# Altium PCB 175-00023, rev2, PCB, Sinistro Pwr Supply.PcbDoc (part 2 of 2)
Units mm, origin at the board's own origin, x right, y up, seen from the top; angles counter-clockwise.
Board outline 210 x 100 mm, 5 copper layers (TopLayer (*.GTL), MidLayer1 (*.G1), AGND (*.GP1), GND (*.GP2), BottomLayer (*GBL)); 99 components, 65 nets, 412 pads, 73 vias.
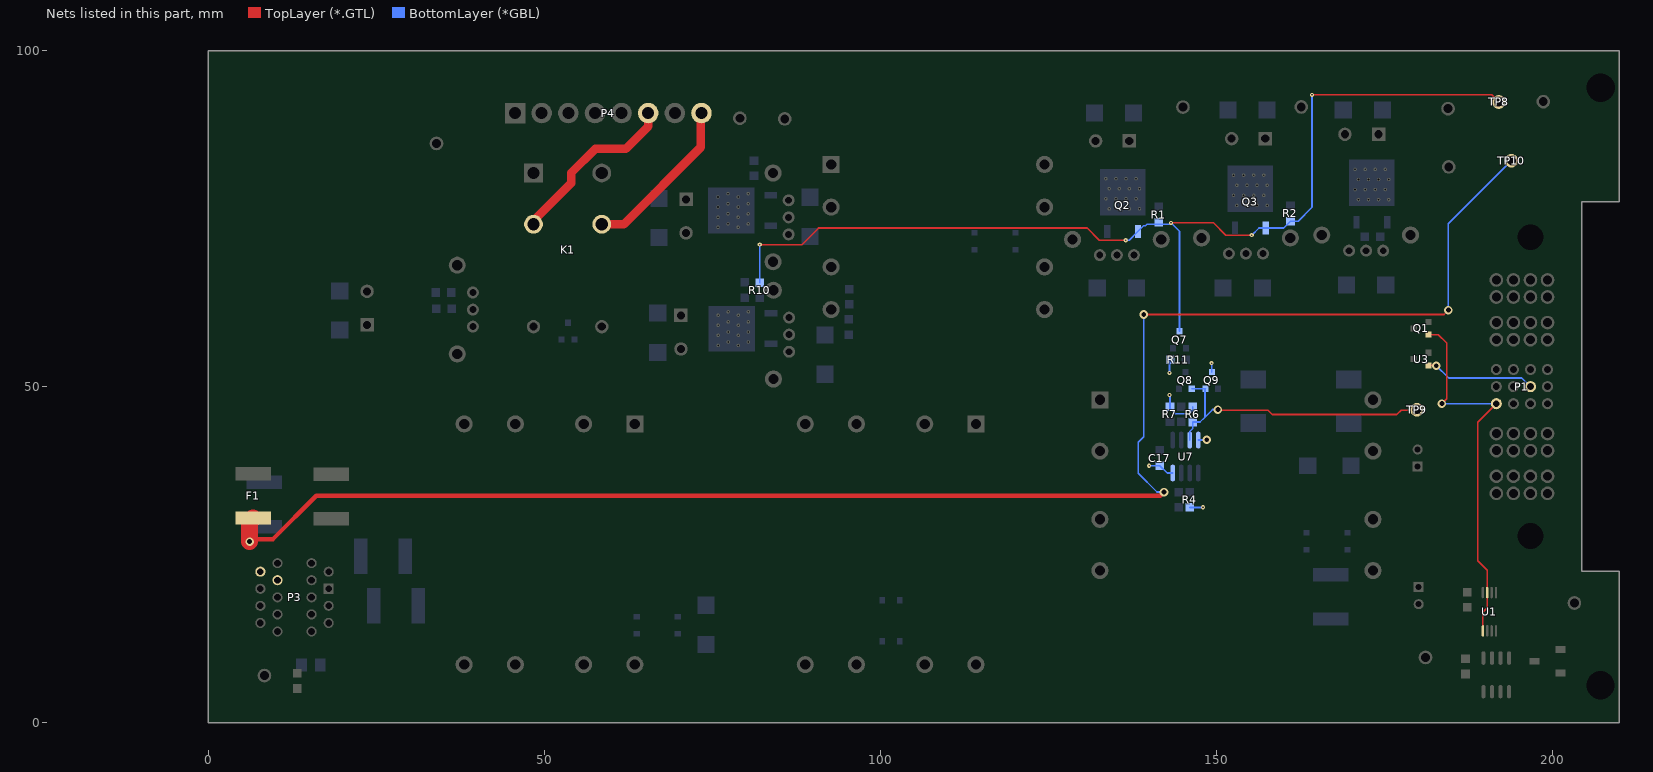
[diagram p5: the nets of this part, all layers, seen from the top]

## Via types
v1: diameter 0.61, hole 0.254, TopLayer (*.GTL) to BottomLayer (*GBL), 37 vias
v2: diameter 1.27, hole 0.711, TopLayer (*.GTL) to BottomLayer (*GBL), 36 vias

## Nets (pads, with @x,y where several pads share a name; then routed paths per layer and width w, separated by ;. In a path a pad name is that pad's centre, name@x,y a point inside that pad or via, vN(x,y) a via of type N, cw(c..) or ccw(c..) an arc to the next point about the centre after c; other vN are vias at no path point) (continued)
POSV_ON: Q2.1 Q3.1 Q7.3 R1.1 R2.1 R10.1 TP8.1 | length 154.8
  TopLayer (*.GTL) w0.254: v1(82.093,71.12) 88.367,71.12 90.843,73.597 130.797,73.597 132.613,71.78 v1(136.55,71.78) ; v1(143.281,74.371) 149.606,74.371 151.435,72.542 v1(155.296,72.542) ; v1(164.262,93.421) 190.983,93.421 TP8.1@192.049,92.354
  BottomLayer (*GBL) w0.254: R10.1@82.093,65.482 v1(82.093,71.12) ; v1(136.55,71.78) 137.046,71.78 Q2.1@138.367,73.101 139.19,73.924 139.477,73.924 139.71,74.157 143.067,74.157 v1(143.281,74.371) 144.549,73.104 Q7.3@144.549,58.235 ; v1(155.296,72.542) 156.365,73.612 Q3.1@157.363,73.612 160.048,73.612 R2.1@161.061,74.625 162.204,74.625 164.262,76.683 v1(164.262,93.421)
SILICON_SN: P1.6 U3.1 | length 16.5
  TopLayer (*.GTL) w0.254: U3.1@181.592,53.162 182.71,53.162 v2(182.761,53.111)
  BottomLayer (*GBL) w0.254: v2(182.761,53.111) 184.589,51.283 195.487,51.283 P1.6@196.77,50
SPLY_DLY: Q8.1 Q9.2 R6.2 TP9.1 U7.3 | length 43.9
  TopLayer (*.GTL) w0.254: v2(150.266,46.584) 150.343,46.507 157.71,46.507 158.371,45.847 176.86,45.847 177.521,46.507 179.814,46.507 TP9.1@179.865,46.558
  BottomLayer (*GBL) w0.254: U7.3@146.075,42.049 146.075,43.332 146.507,43.764 R6.2@146.507,44.729 147.599,44.729 148.336,45.466 ; Q8.1@146.365,49.677 Q9.2@148.402,49.677 148.336,49.611 148.336,45.466 ; v2(150.266,46.584) 149.454,46.584 148.336,45.466
SW_LINE: K1.4 P4.8 | length 24.6
  TopLayer (*.GTL) w1.27: K1.4@58.58,74.168 61.864,74.168 73.312,85.616 73.312,90.603 P4.8@73.414,90.705
SW_NEUT: K1.3 P4.6 | length 26.3
  TopLayer (*.GTL) w1.27: K1.3@48.42,74.168 48.42,74.676 54.008,80.264 54.008,81.788 57.602,85.382 62.147,85.382 65.489,88.724 P4.6@65.489,90.705
VCC: C17.2 F1.2 P3.5 P3.15 Q9.3 R4.1 R6.1 R7.2 R11.2 TP10.1 U7.4 U7.8 | length 260.5
  TopLayer (*.GTL) w0.254: v2(139.217,60.731) 183.896,60.731 v2(184.556,61.392)
  TopLayer (*.GTL) w0.635: v2(6.172,26.949) 6.528,27.305 9.65,27.305 16.102,33.757 141.681,33.757 v2(142.24,34.315)
  TopLayer (*.GTL) w2.54: v2(6.172,26.949) 6.147,26.949 6.147,29.898 F1.2@6.706,30.457
  BottomLayer (*GBL) w0.254: v2(139.217,60.731) 139.217,42.545 138.405,41.732 138.405,37.109 141.199,34.315 v2(142.24,34.315) ; v1(140.03,38.227) C17.2@141.63,38.227 142.709,37.149 U7.8@143.535,37.149 ; v1(143.053,48.743) 143.129,48.666 R7.2@143.129,47.041 143.129,46.761 143.916,45.974 145.974,45.974 146.507,46.507 R6.1@146.507,47.015 ; v1(143.053,52.045) 143.053,53.83 R11.2@143.197,53.975 ; R4.1@146.101,32.029 148.031,32.029 v1(148.057,32.055) ; U7.4@147.345,42.049 148.551,42.049 v2(148.59,42.088) ; v1(149.327,53.492) 149.352,53.467 Q9.3@149.352,52.177 ; v2(184.556,61.392) 184.556,74.244 TP10.1@193.929,83.617
~CS_SLOT: P1.4 Q1.1 U1.1 U1.7 | length 56.3
  TopLayer (*.GTL) w0.254: Q1.1@181.592,57.734 183.065,57.734 184.302,56.497 184.302,48.176 v2@183.65,47.523 ; U1.1@189.685,13.66 189.685,16.449 190.335,17.099 U1.7@190.335,19.36 190.335,22.677 188.933,24.079 188.933,44.703 P1.4@191.69,47.46
  BottomLayer (*GBL) w0.254: v2(183.599,47.473) P1.4@191.677,47.473
pads on no net: D3.2 P1.0 P1.1 P1.7 P1.8 P1.9 P1.10 U4.0 U5.0 U6.0 U7.5 U8.0 U9.0 U10.0
copper on no net: | length 10.5
  TopLayer (*.GTL) w0.178: v1(153.017,94.818) v1@153.12,94.715
  BottomLayer (*GBL) w0.254: 164.897,9.271 ccw(c163.253,9.271) 164.897,9.271

## Polygon pours and split planes (outlines as drawn)
VCC on AGND (*.GP1) (split plane): 151.827,30.545 138.621,30.545 138.495,62.8 151.827,62.8
NetF3_1 on AGND (*.GP1) (split plane): 81.963,72.125 81.964,72.123 81.963,72.12 81.969,72.098 81.973,72.076 81.975,72.073 81.975,72.071 81.989,72.052 82.001,72.034 82.004,72.032 82.005,72.03 83.056,71.063 83.056,70.36 22.655,70.36 22.605,70.351 22.563,70.323 22.535,70.281 22.526,70.231 22.526,32.184 14.099,32.184 14.099,76.071 74.929,76.071 74.955,76.076 74.979,76.08 75.001,76.095 75.021,76.108 75.034,76.128 75.049,76.15 75.053,76.174 75.059,76.2 75.06,79.832 75.06,79.833 81.963,79.88
NetF4_1 on AGND (*.GP1) (split plane): 85.469,10.33 85.437,10.288 85.411,10.226 85.403,10.16 85.403,5.336 26.841,5.336 26.775,5.327 26.713,5.302 26.66,5.261 26.619,5.208 26.594,5.146 26.585,5.08 26.585,2.796 15.247,2.796 15.489,11.809 78.229,11.809 78.26,11.813 78.295,11.818 78.325,11.83 78.357,11.843 78.385,11.865 78.41,11.884 78.43,11.911 78.45,11.937 78.463,11.968 78.476,11.999 78.48,12.031 78.485,12.065 78.482,18.652 78.482,18.653 78.482,18.655 78.125,50.803 78.12,50.835 78.116,50.866 78.115,50.868 78.115,50.869 78.103,50.899 78.09,50.928 78.089,50.929 78.089,50.931 78.069,50.956 78.05,50.981 78.048,50.982 78.048,50.983 78.022,51.002 77.996,51.022 77.995,51.022 77.994,51.023 77.964,51.035 77.935,51.047 77.933,51.048 77.932,51.048 77.9,51.052 77.868,51.056 73.152,51.056 73.102,63.244 85.469,63.244
NetF2_1 on AGND (*.GP1) (split plane): 143.381,74.287 130.939,74.287 130.939,80.645 130.93,80.695 130.902,80.737 130.86,80.765 130.81,80.774 10.795,80.774 10.745,80.765 10.703,80.737 10.675,80.695 10.666,80.645 10.666,32.184 3.304,32.184 3.304,84.326 143.381,84.326
A on AGND (*.GP1) (split plane): 209.49,78.01 204.4,78.01 204.3,78.001 204.205,77.972 204.116,77.924 204.039,77.861 203.976,77.784 203.928,77.695 203.899,77.6 203.89,77.5 203.89,22.5 203.899,22.4 203.928,22.305 203.976,22.216 204.039,22.139 204.116,22.076 204.205,22.028 204.3,21.999 204.4,21.99 209.49,21.99 209.49,0.51 0.51,0.51 0.51,99.49 209.49,99.49
NetFER3_1 on GND (*.GP2) (split plane): 162.304,45.466 162.304,45.464 162.304,45.463 162.308,45.431 162.313,45.4 162.313,45.398 162.313,45.397 162.326,45.367 162.338,45.338 162.339,45.337 162.34,45.335 162.359,45.31 162.379,45.285 162.38,45.284 162.381,45.283 162.407,45.264 162.432,45.244 162.433,45.244 162.435,45.243 162.464,45.231 162.494,45.219 162.495,45.218 162.497,45.218 162.528,45.214 162.56,45.21 162.562,45.21 162.563,45.21 183.6,45.464 203.89,45.464 203.89,32.278 188.851,32.011 188.851,40.005 188.842,40.071 188.817,40.133 188.776,40.186 188.723,40.227 188.661,40.252 188.595,40.261 148.846,40.261 148.846,47.775 162.304,47.775
NetFER3_2 on GND (*.GP2) (split plane): 203.89,67.567 203.89,45.976 183.599,45.976 183.597,45.976 183.596,45.976 162.816,45.725 162.816,48.031 162.807,48.098 162.782,48.159 162.741,48.213 162.688,48.253 162.626,48.279 162.56,48.288 148.844,48.288 148.782,54.608 189.23,54.608 189.296,54.617 189.358,54.642 189.411,54.683 189.452,54.736 189.477,54.798 189.486,54.864 189.486,67.811
NetF6_1 on GND (*.GP2) (split plane): 181.354,60.53 136.587,60.53 136.521,60.522 136.459,60.496 136.406,60.455 136.365,60.402 136.34,60.341 136.331,60.274 136.331,12.956 28.36,12.975 28.482,21.307 35.402,21.271 36.602,18.909 36.605,18.903 36.608,18.896 36.624,18.875 36.639,18.853 36.645,18.849 36.649,18.843 36.67,18.827 36.69,18.81 36.696,18.807 36.702,18.803 36.726,18.793 36.75,18.781 36.757,18.78 36.764,18.777 36.79,18.774 36.816,18.769 36.823,18.769 36.83,18.768 130.175,18.794 130.208,18.798 130.241,18.802 130.241,18.803 130.272,18.815 130.303,18.828 130.33,18.848 130.356,18.868 130.356,18.869 130.376,18.895 130.397,18.921 130.397,18.922 130.409,18.952 130.422,18.983 130.422,18.984 130.427,19.016 130.431,19.049 130.527,66.765 165.099,66.671 165.101,66.672 165.102,66.671 165.134,66.676 165.165,66.68 165.167,66.681 165.169,66.681 165.198,66.693 165.227,66.705 165.228,66.707 165.23,66.707 165.255,66.727 165.28,66.746 165.281,66.748 165.283,66.749 165.302,66.774 165.321,66.799 165.322,66.801 165.323,66.802 165.334,66.832 165.347,66.861 165.347,66.863 165.348,66.864 165.351,66.896 165.355,66.927 165.355,66.929 165.355,66.931 165.136,84.666 165.169,84.685 181.354,84.685
NetF5_1 on GND (*.GP2) (split plane): 164.643,84.909 164.631,84.879 164.63,84.878 164.63,84.876 164.626,84.845 164.622,84.813 164.622,84.812 164.622,84.81 164.84,67.185 130.272,67.278 130.271,67.278 130.238,67.274 130.205,67.27 130.175,67.257 130.143,67.244 130.117,67.224 130.09,67.204 130.069,67.177 130.049,67.151 130.036,67.119 130.024,67.089 130.019,67.056 130.015,67.023 129.919,19.306 36.987,19.281 35.788,21.642 35.785,21.648 35.783,21.653 35.766,21.675 35.751,21.698 35.746,21.702 35.742,21.707 35.721,21.723 35.7,21.741 35.694,21.744 35.689,21.748 35.664,21.758 35.64,21.77 35.633,21.771 35.628,21.774 35.601,21.777 35.574,21.782 35.568,21.782 35.561,21.783 28.486,21.82 28.487,27.994 122.555,27.994 122.621,28.002 122.683,28.028 122.736,28.069 122.777,28.122 122.802,28.183 122.811,28.25 122.811,71.524 150.495,71.524 150.561,71.533 150.623,71.559 150.676,71.599 150.717,71.652 150.742,71.714 150.751,71.78 150.751,84.907 164.652,84.932
NetC23_pos on GND (*.GP2) (split plane): 43.91,57.215 9.05,57.215 9.025,57.21 9.004,57.196 8.99,57.175 8.985,57.15 8.985,33.505 4.431,33.48 4.663,62.622 43.91,62.622
VCC on GND (*.GP2) (split plane): 8.985,27.815 8.983,27.813 8.969,27.792 8.964,27.768 8.91,23.173 8.91,23.172 8.912,23.16 8.915,23.148 8.915,23.147 8.922,23.137 8.928,23.127 8.929,23.127 8.929,23.126 9.639,22.416 9.66,22.402 9.685,22.397 11.779,22.397 11.779,19.987 9.712,19.987 8.461,21.238 8.44,21.252 8.415,21.257 4.289,21.257 4.289,23.73 4.313,23.734 4.334,23.748 4.348,23.769 4.353,23.794 4.429,33.221 8.985,33.246
GND on GND (*.GP2) (split plane): 209.49,78.01 204.4,78.01 204.3,78.001 204.205,77.972 204.116,77.924 204.039,77.861 203.976,77.784 203.928,77.695 203.899,77.6 203.89,77.5 203.89,68.08 189.234,68.328 189.232,68.328 189.23,68.328 189.199,68.324 189.168,68.321 189.166,68.32 189.164,68.319 189.135,68.308 189.106,68.296 189.104,68.295 189.102,68.294 189.077,68.275 189.052,68.256 189.051,68.254 189.049,68.253 189.03,68.228 189.01,68.204 189.009,68.202 189.008,68.2 188.996,68.171 188.984,68.142 188.983,68.14 188.983,68.138 188.978,68.107 188.974,68.076 188.974,68.074 188.974,68.072 188.974,55.12 148.524,55.12 148.522,55.12 148.521,55.12 148.489,55.116 148.457,55.111 148.456,55.111 148.455,55.111 148.425,55.098 148.396,55.086 148.395,55.085 148.393,55.085 148.368,55.065 148.343,55.045 148.342,55.044 148.341,55.043 148.321,55.018 148.302,54.992 148.301,54.991 148.301,54.99 148.289,54.96 148.276,54.93 148.276,54.929 148.276,54.928 148.272,54.896 148.268,54.864 148.268,54.863 148.268,54.862 148.334,48.03 148.334,40.005 148.343,39.939 148.368,39.877 148.409,39.824 148.462,39.783 148.524,39.758 148.59,39.749 188.339,39.749 188.339,31.75 188.339,31.748 188.339,31.745 188.343,31.715 188.348,31.684 188.348,31.682 188.349,31.679 188.361,31.651 188.373,31.622 188.375,31.62 188.375,31.618 188.395,31.594 188.414,31.569 188.416,31.567 188.417,31.566 188.442,31.547 188.467,31.528 188.469,31.527 188.471,31.526 188.5,31.514 188.529,31.503 188.531,31.502 188.533,31.501 188.564,31.498 188.595,31.494 188.597,31.494 188.6,31.494 203.89,31.766 203.89,22.5 203.899,22.4 203.928,22.305 203.976,22.216 204.039,22.139 204.116,22.076 204.205,22.028 204.3,21.999 204.4,21.99 209.49,21.99 209.49,0.51 0.51,0.51 0.51,99.49 209.49,99.49

## Keep-outs
KeepOutLayer:
  lines w0.203: -3.625,3.023 -3.625,8.103 -8.07,8.103 -8.07,91.923 -3.625,91.923 -3.625,97.003 ; -3.625,95.003 204.655,95.003 ; -3.599,2.737 184.844,2.737 ; 204.655,3.023 204.655,8.103 208.465,8.103 208.465,91.923 204.655,91.923 204.655,97.003

## Other copper
TopLayer (*.GTL):
  text "*.GTL - TOP LAYER GERBER DATA" at 58.975,-30.745 h2.03
MidLayer1 (*.G1):
  text "*.G1 --  MID LAYER GERBER DATA" at 60.681,-30.988 h2.03
BottomLayer (*GBL):
  text "c" at 163.779,8.941 h1.52
  text "2012, Las Cumbres Observatory" at 160.528,8.407 h1.52
  text "175-00023, Rev2, SINISTRO PWR SUPPLY" at 163.5,5.105 h1.52
  text "*.GBL - BOTTOM LAYER GERBER DATA" at 58.975,-30.745 h2.03
AGND (*.GP1) (plane layer: these items are gaps in the copper):
  lines w0.127: 138.43,62.865 138.557,30.48 151.892,30.48 151.892,62.865 138.43,62.865
  lines w0.254: 74.93,79.962 82.093,80.01 82.093,72.125 83.185,71.12 83.185,70.231 68.58,70.231 22.655,70.231 22.655,32.055 13.97,32.055 13.97,76.2 17.78,76.2 69.85,76.2 74.929,76.2 74.931,79.833 ; 3.175,32.055 3.175,84.455 143.51,84.455 143.51,74.157 130.81,74.157 130.81,80.645 10.795,80.645 10.795,32.055 3.175,32.055
  lines w0.508: 19.856,12.065 15.24,12.065 ; 72.844,63.681 72.897,50.8 77.868,50.8 78.226,18.652 78.229,12.065 15.24,12.065 ; 73.025,63.5 85.725,63.5 85.725,10.16 ; 85.659,10.16 85.659,5.08 26.841,5.08 26.841,2.54 14.984,2.54 15.24,12.065
  text "*.GP1 - INTERNAL PLANE LAYER 1 GERBER DATA" at 58.975,-30.745 h2.03
GND (*.GP2) (plane layer: these items are gaps in the copper):
  lines w0.127: 4.224,23.859 4.224,21.192 8.415,21.192 9.685,19.922 11.844,19.922 11.844,22.462 9.685,22.462 8.975,23.172 9.028,27.767 ; 4.289,23.794 4.599,62.687 43.975,62.687 43.975,57.15 9.05,57.15 9.05,27.775 ; 202.176,32.69 202.192,32.674
  lines w0.254: 4.365,33.35 9.05,33.376
  lines w0.508: 28.1,12.7 28.229,21.565 ; 28.211,12.719 136.587,12.7 136.587,60.274 181.61,60.274 181.61,84.941 165.1,84.941 164.878,84.813 165.099,66.928 130.271,67.022 130.175,19.05 36.83,19.025 35.56,21.527 28.229,21.565 ; 165.034,85.189 150.495,85.163 150.495,71.78 122.555,71.78 122.555,28.25 120.65,28.25 28.231,28.25 28.229,21.565 ; 204.116,45.72 183.599,45.72 162.56,45.466 162.56,48.031 148.59,48.031 ; 204.205,67.818 189.23,68.072 189.23,54.864 148.524,54.864 148.59,48.031 ; 204.3,32.029 188.595,31.75 188.595,40.005 148.59,40.005 148.59,48.031
  text "*.GP2 - INTERNAL PLANE LAYER 2 GERBER DATA" at 58.875,-31.25 h2.03

## Silkscreen, mask and mechanical layers (free items; w line width, h text height)
TopOverlay:
  rectangle: 57.328,-8.992 58.42,-8.788
  rectangle: 36.297,90.932 42.824,95.606
  lines w0.254: -15.08,0 -12.54,0 -12.54,100 -15.08,100 -15.08,0
  text "780-00028" at 3.432,95.111 h1.02
  text "AGND" at 196.748,94.285 h1.02
  text "FS12-500  (+/-5V)" at 100.482,94.056 h1.52
  text "+5V" at 143.332,93.167 h1.02
  text "-12V" at 182.702,93.142 h1.02
  text "+12V" at 159.563,93.116 h1.02
  text "SCH, SINISTRO POWER SUPPLY  REV:" at 3.907,92.686 h1.02
  text "+28V" at 83.693,92.151 h1.02
  text "-5V" at 77.648,91.77 h1.02
  text "AGND" at 32.436,87.757 h1.02
  text "VCC" at 192.938,85.496 h1.02
  text "A" at 182.626,40.234 h1.02
  text "GND" at 182.474,37.592 h1.02
  text "GND" at 182.067,19.66 h1.02
  text "+24V" at 201.828,19.533 h1.02
  text "24RTN" at 181.712,17.094 h1.02
  text "AGND" at 179.527,11.227 h1.02
  text "AGND" at 6.985,9.017 h1.02
  text "PGM" at 199.7,4.9 h1.02
  text "FS10-1200  (Vcc)" at 40.005,4.242 h1.52
  text "FS28-420  (+28V)" at 88.443,4.242 h1.52
  text "FS28-700  (+/- 12V)" at 140.538,4.242 h1.52
  text "*.GTO - TOP OVERLAY GERBER DATA" at 58.975,-30.745 h2.03
BottomOverlay:
  text "*GBO - BOTTOM OVERLAY GERBER DATA" at 58.975,-30.745 h2.03
TopPaste:
  text "*.GTP - TOP-SIDE SOLDER PASTE MASK" at 58.975,-30.745 h2.03
BottomPaste:
  text "*.GBP - BOTTOM-SIDE SOLDER PASTE MASK" at 58.975,-30.745 h2.03
TopSolder:
  text "*.GTS - TOP SOLDER MASK GERBER DATA" at 58.975,-30.745 h2.03
BottomSolder:
  rectangle: 108.839,3.581 165.92,11.938
  text "*.GBS - BOTTOM SOLDER MASK GERBER DATA" at 58.975,-30.745 h2.03
Mechanical1:
  lines w1: 0,0 0,16 0,85 0,100 210,100 210,77.5 204.4,77.5 204.4,22.5 210,22.5 210,0 0,0
Mechanical2:
  lines w0.254: -294.418,-214.559 -294.418,191.841 238.982,191.841 238.982,-214.559 -294.418,-214.559 ; 135.985,-211.867 ccw(c137.255,-211.867) 137.255,-213.137 145.637,-213.137 ccw(c145.637,-212.121) 146.653,-212.121 146.653,-207.803 ccw(c145.637,-207.803) 145.637,-206.787 135.985,-206.787 135.985,-211.867 ; 135.985,-204.501 ccw(c137.255,-204.501) 137.255,-205.771 236.315,-205.771 ccw(c236.315,-204.501) 237.585,-204.501 237.585,-199.675 ccw(c236.315,-199.675) 236.315,-198.405 135.985,-198.405 135.985,-204.501 ; 135.985,-196.119 ccw(c137.255,-196.119) 137.255,-197.389 185.007,-197.389 ccw(c185.007,-196.119) 186.277,-196.119 186.277,-192.309 ccw(c185.007,-192.309) 185.007,-191.039 135.985,-191.039 135.985,-196.119 ; 135.985,-189.007 ccw(c137.001,-189.007) 137.001,-190.023 157.575,-190.023 ccw(c157.575,-188.753) 158.845,-188.753 158.845,-184.943 ccw(c157.575,-184.943) 157.575,-183.673 135.985,-183.673 135.985,-189.007 ; 147.669,-212.121 ccw(c148.685,-212.121) 148.685,-213.137 198.469,-213.137 ccw(c198.469,-212.121) 199.485,-212.121 199.485,-207.803 ccw(c198.469,-207.803) 198.469,-206.787 147.669,-206.787 147.669,-212.121 ; 159.861,-188.753 ccw(c161.131,-188.753) 161.131,-190.023 185.007,-190.023 ccw(c185.007,-188.753) 186.277,-188.753 186.277,-184.943 ccw(c185.007,-184.943) 185.007,-183.673 159.861,-183.673 159.861,-188.753 ; 187.293,-196.119 ccw(c188.563,-196.119) 188.563,-197.389 236.315,-197.389 ccw(c236.315,-196.119) 237.585,-196.119 237.585,-192.309 ccw(c236.315,-192.309) 236.315,-191.039 187.293,-191.039 187.293,-196.119 ; 187.293,-188.753 ccw(c188.563,-188.753) 188.563,-190.023 212.439,-190.023 ccw(c212.439,-188.753) 213.709,-188.753 213.709,-184.943 ccw(c212.439,-184.943) 212.439,-183.673 187.293,-183.673 187.293,-188.753 ; 200.501,-211.867 ccw(c201.771,-211.867) 201.771,-213.137 210.153,-213.137 ccw(c210.153,-212.121) 211.169,-212.121 211.169,-207.803 ccw(c210.153,-207.803) 210.153,-206.787 200.501,-206.787 200.501,-211.867 ; 212.185,-212.121 ccw(c213.201,-212.121) 213.201,-213.137 236.315,-213.137 ccw(c236.315,-211.867) 237.585,-211.867 237.585,-208.057 ccw(c236.315,-208.057) 236.315,-206.787 212.185,-206.787 212.185,-212.121 ; 214.725,-188.753 ccw(c215.995,-188.753) 215.995,-190.023 236.315,-190.023 ccw(c236.315,-188.753) 237.585,-188.753 237.585,-184.943 ccw(c236.315,-184.943) 236.315,-183.673 214.725,-183.673 214.725,-188.753
  lines w0.432: -284.151,-102.806 -149.599,-102.806 ; -284.151,-95.084 -149.599,-95.084 ; -285.675,-162.711 ccw(c-283.186,-162.711) -283.186,-165.2 -150.564,-165.2 ccw(c-150.564,-162.711) -148.075,-162.711 -148.075,-80.639 ccw(c-150.564,-80.639) -150.564,-78.15 -283.186,-78.15 ccw(c-283.186,-80.639) -285.675,-80.639 -285.675,-162.711
  lines w0.508: -293.909,-198.154 cw(c-292.64,-200.056) -292.64,-197.77 -280.956,-197.77 cw(c-280.956,-200.056) -278.67,-200.056 -278.67,-201.326 ccw(c-278.416,-201.326) -278.416,-201.58 -211.36,-201.58 cw(c-211.36,-203.866) -209.074,-203.866 -209.074,-212.502 cw(c-211.36,-212.502) -209.458,-213.77 ; 134.872,-214.152 cw(c137.255,-211.867) 133.953,-211.867 133.953,-169.449 cw(c137.255,-169.449) 137.255,-166.147 236.315,-166.147 cw(c236.315,-169.449) 238.567,-167.034 ; -293.91,-212.502 ccw(c-292.64,-212.502) -292.64,-213.772 -211.36,-213.772 ccw(c-211.36,-212.502) -210.09,-212.502 -210.09,-203.866 ccw(c-211.36,-203.866) -211.36,-202.596 -278.416,-202.596 cw(c-278.416,-201.326) -279.686,-201.326 -279.686,-200.056 ccw(c-280.956,-200.056) -280.956,-198.786 -292.64,-198.786 ccw(c-292.64,-200.056) -293.91,-200.056 -293.91,-212.502 ; -103.156,-209.987 ccw(c-99.854,-209.987) -99.854,-213.289 20.542,-213.289 ccw(c20.542,-209.987) 23.844,-209.987 23.844,-169.601 ccw(c20.542,-169.601) 20.542,-166.299 -99.854,-166.299 ccw(c-99.854,-169.601) -103.156,-169.601 -103.156,-209.987 ; 134.969,-211.867 ccw(c137.255,-211.867) 137.255,-214.153 236.315,-214.153 ccw(c236.315,-211.867) 238.601,-211.867 238.601,-169.449 ccw(c236.315,-169.449) 236.315,-167.163 137.255,-167.163 ccw(c137.255,-169.449) 134.969,-169.449 134.969,-211.867
  lines w0.61: -38.386,-209.225 -34.576,-209.225 ; -38.386,-202.875 -34.576,-202.875 ; -38.386,-196.525 -34.576,-196.525 ; -38.386,-190.175 -34.576,-190.175 ; -38.386,-183.825 -34.576,-183.825
  lines w0.762: -307.118,-227.259 -307.118,204.541 251.682,204.541 251.682,-227.259 -307.118,-227.259
  lines w1.27: 139.668,-179.888 181.578,-179.888 ; 139.668,-170.236 181.578,-170.236 ; 181.578,-179.888 181.578,-170.236 ; 181.578,-179.888 139.414,-179.888 139.414,-170.236 181.578,-170.236
  text "NOTES (UNLESS OTHERWISE SPECIFIED):" at -286.29,178.531 h2.29
  text "GENERAL" at -283.75,173.451 h2.29
  text "1)" at -281.21,168.37 h1.91
  text "PCB IS 5-LAYER, .062\" THICK." at -276.13,168.371 h1.91
  text "2)" at -281.21,164.56 h1.91
  text "CONSTRUCTION IS SOLDER-MASK-OVER-BARE-COPPER (SMOBC)." at -276.13,164.56 h1.91
  text "3)" at -281.21,160.75 h1.91
  text "ACCEPTABILITY SHALL BE BASED ON IPC-A-600, CLASS 2." at -276.13,160.75 h1.91
  text "4)" at -281.21,156.94 h1.91
  text "THE FOLLOWING GERBER RS274X PHOTO TOOL FILES SHALL BE USED TO DEFINE ALL CIRCUIT FEATURES:" at -276.13,156.94 h1.91
  text "*.GTL - TOP LAYER GERBER DATA" at -269.171,151.582 h2.03
  text "*.G1 - MID LAYER 1 GERBER DATA" at -269.171,147.679 h2.03
  text "*.GP1 - INTERNAL PLANE LAYER 1 GERBER DATA" at -269.171,135.97 h2.03
  text "*.GP2 - INTERNAL PLANE LAYER 2 GERBER DATA" at -269.171,132.066 h2.03
  text "*.GBL - BOTTOM LAYER GERBER DATA" at -269.171,116.454 h2.03
  text "*.GTO - TOP OVERLAY GERBER DATA" at -269.171,112.551 h2.03
  text "*.GTS - TOP SOLDER MASK GERBER DATA" at -269.171,108.648 h2.03
  text "*.GTP - TOP-SIDE SOLDER PASTE MASK" at -269.171,104.744 h2.03
  text "*GBO - BOTTOM OVERLAY GERBER DATA" at -269.171,100.841 h2.03
  text "*.GBS - BOTTOM SOLDER MASK GERBER DATA" at -269.171,96.938 h2.03
  text "*.GBP - BOTTOM-SIDE SOLDER PASTE MASK" at -269.171,93.035 h2.03
  text "5)" at -283.674,74.855 h1.91
  text "THE PHOTO TOOL SHALL NOT BE COMPENSATED WITHOUT PRIOR ENGINEERING APPROVAL." at -278.594,74.855 h1.91
  text "PCB DESIGNER: RICH LOBDILL   PH (805) 880-1621  FAX (805) 961-1792." at -278.594,71.046 h1.91
  text "FABRICATION TOLERANCES" at -282.277,62.758 h2.29
  text "6)" at -279.737,57.677 h1.91
  text "END PRODUCT CONDUCTOR WIDTHS AND PAD DIAMETERS SHALL NOT VARY MORE THAN" at -274.657,57.677 h1.91
  text "0.002\" FROM THE 1:1 DIMENSIONS OF THE MASTER ARTWORK." at -274.657,53.868 h1.91
  text "7)" at -279.737,50.057 h1.91
  text "THE CONDUCTIVE PATTERN SHALL BE POSITIONED SO THAT THE LOCATION OF ANY PAD OR" at -274.657,50.057 h1.91
  text "LAND SHALL BE WITHIN 0.005\" DIAMETER TO THE TRUE POSITION OF THE HOLE IT CIRCUMSCRIBES." at -274.657,46.248 h1.91
  text "8)" at -279.737,42.437 h1.91
  text "ALL DRILL HOLE SIZES AND TOLERANCES APPLY AFTER PLATING." at -274.657,42.437 h1.91
  text "9)" at -279.737,38.627 h1.91
  text "THE MINIMUM ANNULAR RING SHALL BE 0.005\"." at -274.657,38.627 h1.91
  text "10)" at -281.134,34.817 h1.91
  text "BOW AND TWIST SHALL NOT EXCEED 0.010\" PER INCH." at -274.657,34.817 h1.91
  text "11)" at -280.88,31.007 h1.91
  text "FOR PCB ROUTING DIMENSIONS: .XXX = +/-.005\"  .XX = +/-.020\"" at -274.657,31.007 h1.91
  text "MATERIAL" at -282.277,25.928 h2.29
  text "12)" at -281.134,20.847 h1.91
  text "BASE MATERIAL IS FR4 EPOXY FIBERGLASS" at -274.479,20.696 h1.91
  text "SEE STACK-UP LEGEND FOR COPPER CLADDING CALL OUTS" at -274.479,17.14 h1.91
  text "13)" at -281.134,17.037 h1.91
  text "PLATING" at -282.277,11.958 h2.29
  text "14)" at -281.134,7.004 h1.91
  text "ALL HOLES AND CONDUCTIVE SURFACES SHALL BE PLATED WITH A MINIMUM OF 0.001\" COPPER." at -274.657,7.004 h1.91
  text "15a)" at -281.134,3.194 h1.91
  text "AFTER SOLDERMASK, ALL EXPOSED HOLES AND CONDUCTIVE SURFACES SHALL BE COATED" at -274.657,3.194 h1.91
  text "WITH A GOLD IMMERSION PLATING TO PRESERVE SOLDERABILITY." at -274.479,-0.64 h1.91
  text "15b)" at -281.667,-4.731 h1.91
  text "COPPER THEVING ON LAYERS AS NEEDED" at -274.498,-5.08 h1.91
  text "COATINGS" at -282.379,-10.724 h2.29
  text "16)" at -281.109,-15.678 h1.91
  text "THE SOLDERMASK SHALL BE BLACK LIQUID PHOTO-IMAGEABLE PER IPC-SM-840, TYPE-B, CLASS 2." at -274.759,-15.678 h1.91
  text "17)" at -281.236,-19.488 h1.91
  text "THE SOLDERMASK REGISTRATION ALLOWANCE IS 0.003\".  THERE SHALL BE NO SOLDERMASK ON" at -274.759,-19.488 h1.91
  text "ANY SOLDER PAD OR LAND." at -274.759,-23.298 h1.91
  text "MARKING" at -282.379,-28.377 h2.29
  text "18)" at -281.236,-33.331 h1.91
  text "THE LEGEND SHALL BE SCREEN-PRINTED USING PERMANENT YELLOW EPOXY INK." at -274.759,-33.331 h1.91
  text "19)" at -281.236,-37.141 h1.91
  text "THE SCREEN PRINTING REGISTRATION ALLOWANCE IS 0.007\".  THERE SHALL BE NO INK ON ANY" at -274.759,-37.141 h1.91
  text "SOLDER PAD OR LAND." at -274.759,-40.95 h1.91
  text "20)" at -281.49,-44.761 h1.91
  text "THE VENDOR CODE AND UL FLAMMABILITY RATING MAY BE ETCHED IN THE FOIL OR MARKED IN" at -274.759,-44.761 h1.91
  text "PERMANENT EPOXY INK (VENDOR'S OPTION)." at -274.759,-48.57 h1.91
  text "ELECTRICAL TESTING" at -282.379,-53.65 h2.29
  text "21)" at -281.236,-58.604 h1.91
  text "ALL BOARDS SHALL BE ELECTRICALLY TESTED TO THE SUPPLIED IPC-D-356A NET LIST" at -274.759,-58.604 h1.91
  text "FOR CONTINUITY, OPENS AND SHORTS." at -274.759,-62.413 h1.91
  text "Layer Stack Up Detail for: 175-00023, rev1, PCB, Sinistro Pwr Supply.PcbDoc" at -284.151,-87.823 h1.78
  text "Layer" at -284.151,-97.967 h1.78
  text "COPPER THICKNESS" at -223.375,-100.575 h2.54
  text "Name" at -284.151,-101.523 h1.78
  text "TopLayer (*.GTL)" at -284.151,-108.731 h2.49
  text "1/2 oz,  1 oz Finished" at -226.751,-109.299 h2.54
  text "MidLayer1 (*.G1)" at -284.151,-120.151 h2.49
  text "1 oz" at -227.363,-120.407 h2.54
  text "AGND (*.GP1)" at -284.151,-131.571 h2.49
  text "1 oz" at -228.213,-131.932 h2.54
  text "1 oz" at -228.213,-142.432 h2.54
  text "GND (*.GP2)" at -284.151,-142.99 h2.49
  text "BottomLayer (*GBL)" at -284.151,-154.41 h2.49
  text "1/2 oz,  1 oz Finished" at -230.301,-155.449 h2.54
  text "Las Cumbres Observatory, Inc." at 185.896,-170.744 h2.29
  text "Las Cumbres Observatory" at 140.938,-173.792 h3.81
  text "PRIMARY PCB SPECIFICATIONS" at -91.802,-174.173 h5.08
  text "6740 Cortona Dr." at 197.072,-174.656 h2.29
  text "Global Telescope Network" at 145.002,-177.856 h3.17
  text "Goleta, CA 93117" at 195.802,-178.466 h2.29
  text "(REFER TO COMPLETE SPEC LISTING AT LEFT FOR FURTHER DETAILS)" at -100.616,-179.38 h2.54
  text "www.lcogt.net" at 199.358,-182.174 h2.29
  text "DATE" at 136.493,-184.988 h0.81
  text "DESIGNED" at 160.369,-184.988 h0.81
  text "DRAWN" at 187.801,-184.988 h0.81
  text "SCALE" at 215.233,-184.988 h0.81
  text "NUMBER OF LAYERS" at -98.076,-185.73 h3.81
  text "5" at -7.906,-185.73 h3.81
  text "Rich Lobdill" at 195.548,-187.508 h1.4
  text "Rich Lobdill" at 166.973,-187.635 h1.4
  text "1 : 1" at 222.472,-187.991 h2.29
  text "12/3/2012" at 137.255,-188.168 h2.29
  text "FINISHED THICKNESS" at -98.076,-192.08 h3.81
  text ".062\"" at -12.351,-192.08 h3.81
  text "CHECKED/DATE" at 136.493,-192.354 h0.81
  text "APPROVED/DATE" at 187.801,-192.354 h0.81
  text "BASE MATERIAL" at -98.076,-198.43 h3.81
  text "FR4" at -14.256,-198.43 h3.81
  text "TITLE" at 136.493,-199.72 h0.81
  text "NOTICE" at -292.513,-202.469 h2.54
  text "175-00023, SINISTRO POWER SUPPLY" at 142.081,-203.383 h2.54
  text "GOLD IMMERSION" at -26.804,-203.942 h3.81
  text "PLATING TYPE" at -98.076,-204.78 h3.81
  text "THIS DRAWING EMBODIES A PROPRIETARY DESIGN OWNED BY LAS CUMBRES" at -291.624,-205.39 h1.52
  text "OBSERVATORY.  IT IS SUBMITTED FOR A SPECIFIC PURPOSE UNDER A CON-" at -291.624,-207.93 h1.52
  text "SIZE" at 136.493,-208.102 h0.81
  text "DOC NO." at 148.177,-208.102 h0.81
  text "REV" at 201.009,-208.102 h0.81
  text "SHEET" at 212.693,-208.102 h0.81
  text "FIDENTIAL RELATIONSHIP, AND EXCEPT FOR PURPOSES EXPRESSLY GRANTED" at -291.624,-210.343 h1.52
  text "OF" at 223.615,-210.724 h1.52
  text "SOLDER MASK COLOR" at -98.076,-211.13 h3.81
  text "BLACK" at -11.081,-211.13 h3.81
  text "1" at 219.297,-211.232 h2.54
  text "X" at 229.457,-211.232 h2.54
  text "2" at 204.692,-211.562 h3.3
  text "-" at 162.274,-211.613 h3.3
  text "GPT" at 180.555,-211.988 h3.3
  text "C" at 139.922,-212.019 h2.54
  text "IN WRITING, ALL RIGHTS ARE RESERVED BY LAS CUMBRES OBSERVATORY." at -291.624,-212.629 h1.52
Mechanical5:
  text "175-00023, Rev2, Sinistoro Power Supply" at 59.51,-19.808 h2.03
  text "LAS CUMBRES OBSERVATORY   12/3/2012" at 59.51,-23.619 h2.03
DrillDrawing:
  lines w0.254: -294.418,-214.559 -294.418,191.841 238.982,191.841 238.982,-214.559 -294.418,-214.559 ; 135.985,-211.867 ccw(c137.255,-211.867) 137.255,-213.137 145.637,-213.137 ccw(c145.637,-212.121) 146.653,-212.121 146.653,-207.803 ccw(c145.637,-207.803) 145.637,-206.787 135.985,-206.787 135.985,-211.867 ; 135.985,-204.501 ccw(c137.255,-204.501) 137.255,-205.771 236.315,-205.771 ccw(c236.315,-204.501) 237.585,-204.501 237.585,-199.675 ccw(c236.315,-199.675) 236.315,-198.405 135.985,-198.405 135.985,-204.501 ; 135.985,-196.373 ccw(c137.001,-196.373) 137.001,-197.389 173.069,-197.389 ccw(c173.069,-196.119) 174.339,-196.119 174.339,-192.309 ccw(c173.069,-192.309) 173.069,-191.039 135.985,-191.039 135.985,-196.373 ; 147.669,-212.121 ccw(c148.685,-212.121) 148.685,-213.137 198.469,-213.137 ccw(c198.469,-212.121) 199.485,-212.121 199.485,-207.803 ccw(c198.469,-207.803) 198.469,-206.787 147.669,-206.787 147.669,-212.121 ; 175.355,-196.119 ccw(c176.625,-196.119) 176.625,-197.389 212.439,-197.389 ccw(c212.439,-196.119) 213.709,-196.119 213.709,-192.309 ccw(c212.439,-192.309) 212.439,-191.039 175.355,-191.039 175.355,-196.119 ; 200.501,-211.867 ccw(c201.771,-211.867) 201.771,-213.137 210.153,-213.137 ccw(c210.153,-212.121) 211.169,-212.121 211.169,-207.803 ccw(c210.153,-207.803) 210.153,-206.787 200.501,-206.787 200.501,-211.867 ; 212.185,-212.121 ccw(c213.201,-212.121) 213.201,-213.137 236.315,-213.137 ccw(c236.315,-211.867) 237.585,-211.867 237.585,-208.057 ccw(c236.315,-208.057) 236.315,-206.787 212.185,-206.787 212.185,-212.121 ; 214.725,-196.119 ccw(c215.995,-196.119) 215.995,-197.389 236.315,-197.389 ccw(c236.315,-196.119) 237.585,-196.119 237.585,-192.309 ccw(c236.315,-192.309) 236.315,-191.039 214.725,-191.039 214.725,-196.119
  lines w0.508: -293.782,-198.535 cw(c-292.513,-200.437) -292.513,-198.151 -280.829,-198.151 cw(c-280.829,-200.437) -278.543,-200.437 -278.543,-201.707 ccw(c-278.289,-201.707) -278.289,-201.961 -211.233,-201.961 cw(c-211.233,-204.247) -208.947,-204.247 -208.947,-212.883 cw(c-211.233,-212.883) -209.331,-214.151 ; 134.84,-214.119 cw(c137.255,-211.867) 133.953,-211.867 133.953,-191.039 cw(c135.985,-191.039) 135.985,-189.007 236.315,-189.007 cw(c236.315,-192.309) 238.567,-189.894 ; -293.783,-212.883 ccw(c-292.513,-212.883) -292.513,-214.153 -211.233,-214.153 ccw(c-211.233,-212.883) -209.963,-212.883 -209.963,-204.247 ccw(c-211.233,-204.247) -211.233,-202.977 -278.289,-202.977 cw(c-278.289,-201.707) -279.559,-201.707 -279.559,-200.437 ccw(c-280.829,-200.437) -280.829,-199.167 -292.513,-199.167 ccw(c-292.513,-200.437) -293.783,-200.437 -293.783,-212.883 ; 134.969,-211.867 ccw(c137.255,-211.867) 137.255,-214.153 236.315,-214.153 ccw(c236.315,-211.867) 238.601,-211.867 238.601,-192.309 ccw(c236.315,-192.309) 236.315,-190.023 135.985,-190.023 ccw(c135.985,-191.039) 134.969,-191.039 134.969,-211.867
  lines w0.762: -307.118,-227.259 -307.118,204.541 251.682,204.541 251.682,-227.259 -307.118,-227.259
  text ".Legend" at -28.379,-109.987 h2.54
  text "DESIGNED" at 136.493,-192.354 h0.81
  text "DRAWN" at 175.863,-192.354 h0.81
  text "SCALE" at 215.233,-192.354 h0.81
  text "Rich Lobdill" at 148.837,-194.798 h1.4
  text "Rich Lobdill" at 188.487,-194.849 h1.4
  text "1 : 1" at 222.472,-195.357 h2.29
  text "TITLE" at 136.493,-199.72 h0.81
  text "NOTICE" at -292.386,-202.85 h2.54
  text "175-00023, SINISTRO POWER SUPPLY" at 142.005,-203.383 h2.54
  text "THIS DRAWING EMBODIES A PROPRIETARY DESIGN OWNED BY LAS CUMBRES" at -291.497,-205.771 h1.52
  text "SIZE" at 136.493,-208.102 h0.81
  text "DOC NO." at 148.177,-208.102 h0.81
  text "REV" at 201.009,-208.102 h0.81
  text "SHEET" at 212.693,-208.102 h0.81
  text "OBSERVATORY.  IT IS SUBMITTED FOR A SPECIFIC PURPOSE UNDER A CON-" at -291.497,-208.311 h1.52
  text "FIDENTIAL RELATIONSHIP, AND EXCEPT FOR PURPOSES EXPRESSLY GRANTED" at -291.497,-210.724 h1.52
  text "OF" at 223.615,-210.724 h1.52
  text "2" at 218.916,-211.232 h2.54
  text "X" at 229.457,-211.232 h2.54
  text "-" at 162.274,-211.613 h3.3
  text "2" at 204.565,-211.613 h3.3
  text "C" at 139.922,-212.019 h3.05
  text "GD1" at 183.102,-212.019 h3.05
  text "IN WRITING, ALL RIGHTS ARE RESERVED BY LAS CUMBRES OBSERVATORY." at -291.497,-213.01 h1.52

## Dimensions
-0.56,-0.04 to -0.56,99.96 on Mechanical2
0,100 to 210,100 on Mechanical2

## Text inside footprints (layer, text, board x,y; h text height)
P1: TopOverlay "1" at 201.088,47.079 h1.02; TopOverlay "PCB EDGE" at 206.93,43.65 h1.27 r90; TopOverlay "13" at 188.261,35.014 h1.02; TopOverlay "16" at 188.261,64.097 h1.02; TopOverlay "4" at 189.023,46.952 h1.02; TopOverlay "12" at 188.515,51.905 h1.02; TopOverlay "14" at 188.007,41.364 h1.02; TopOverlay "15" at 188.388,57.747 h1.02